# EAGLE board untitled (EAGLE 9.3.0)
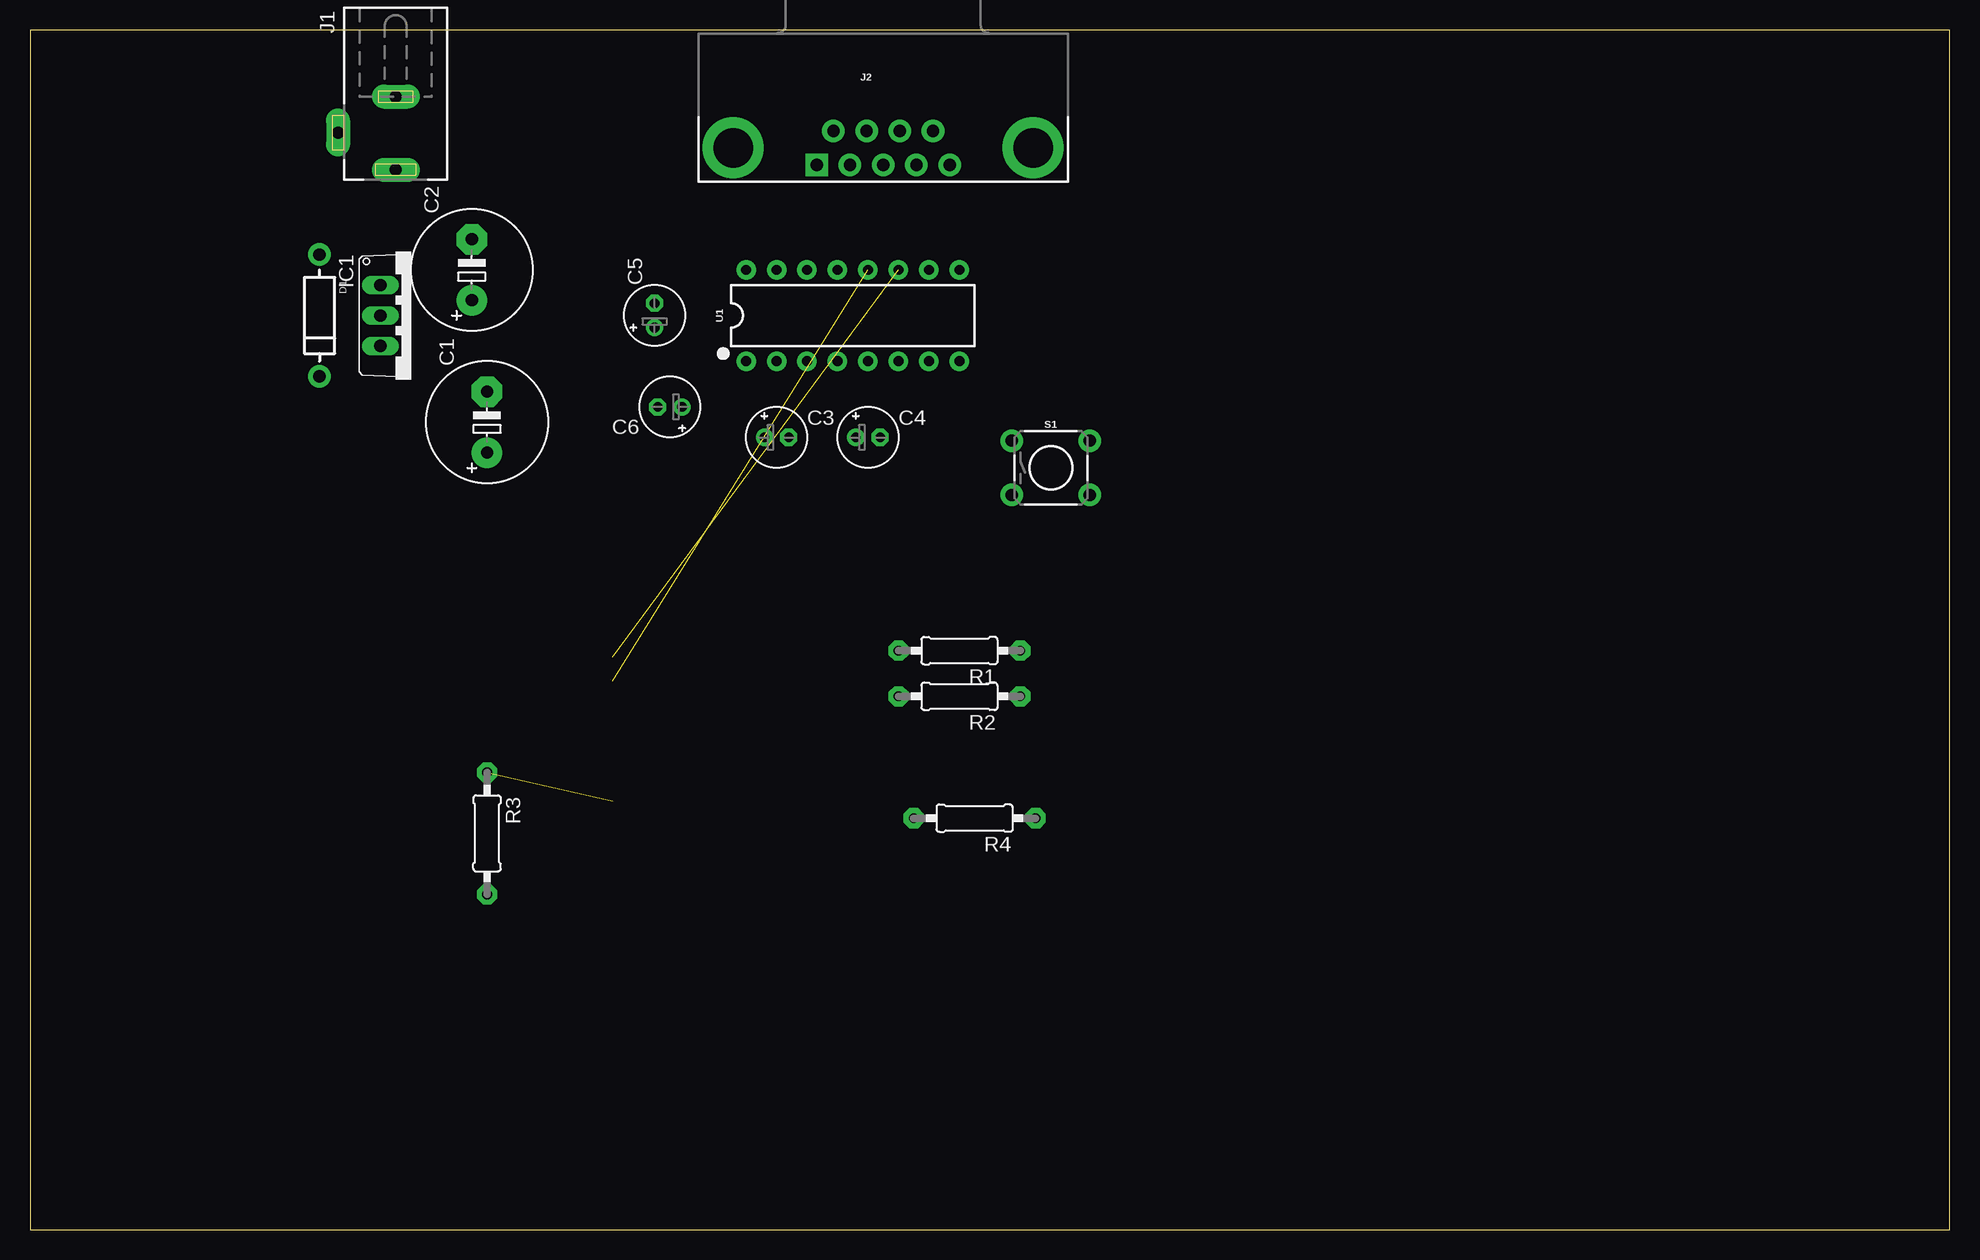
[diagram p0: board, top side]
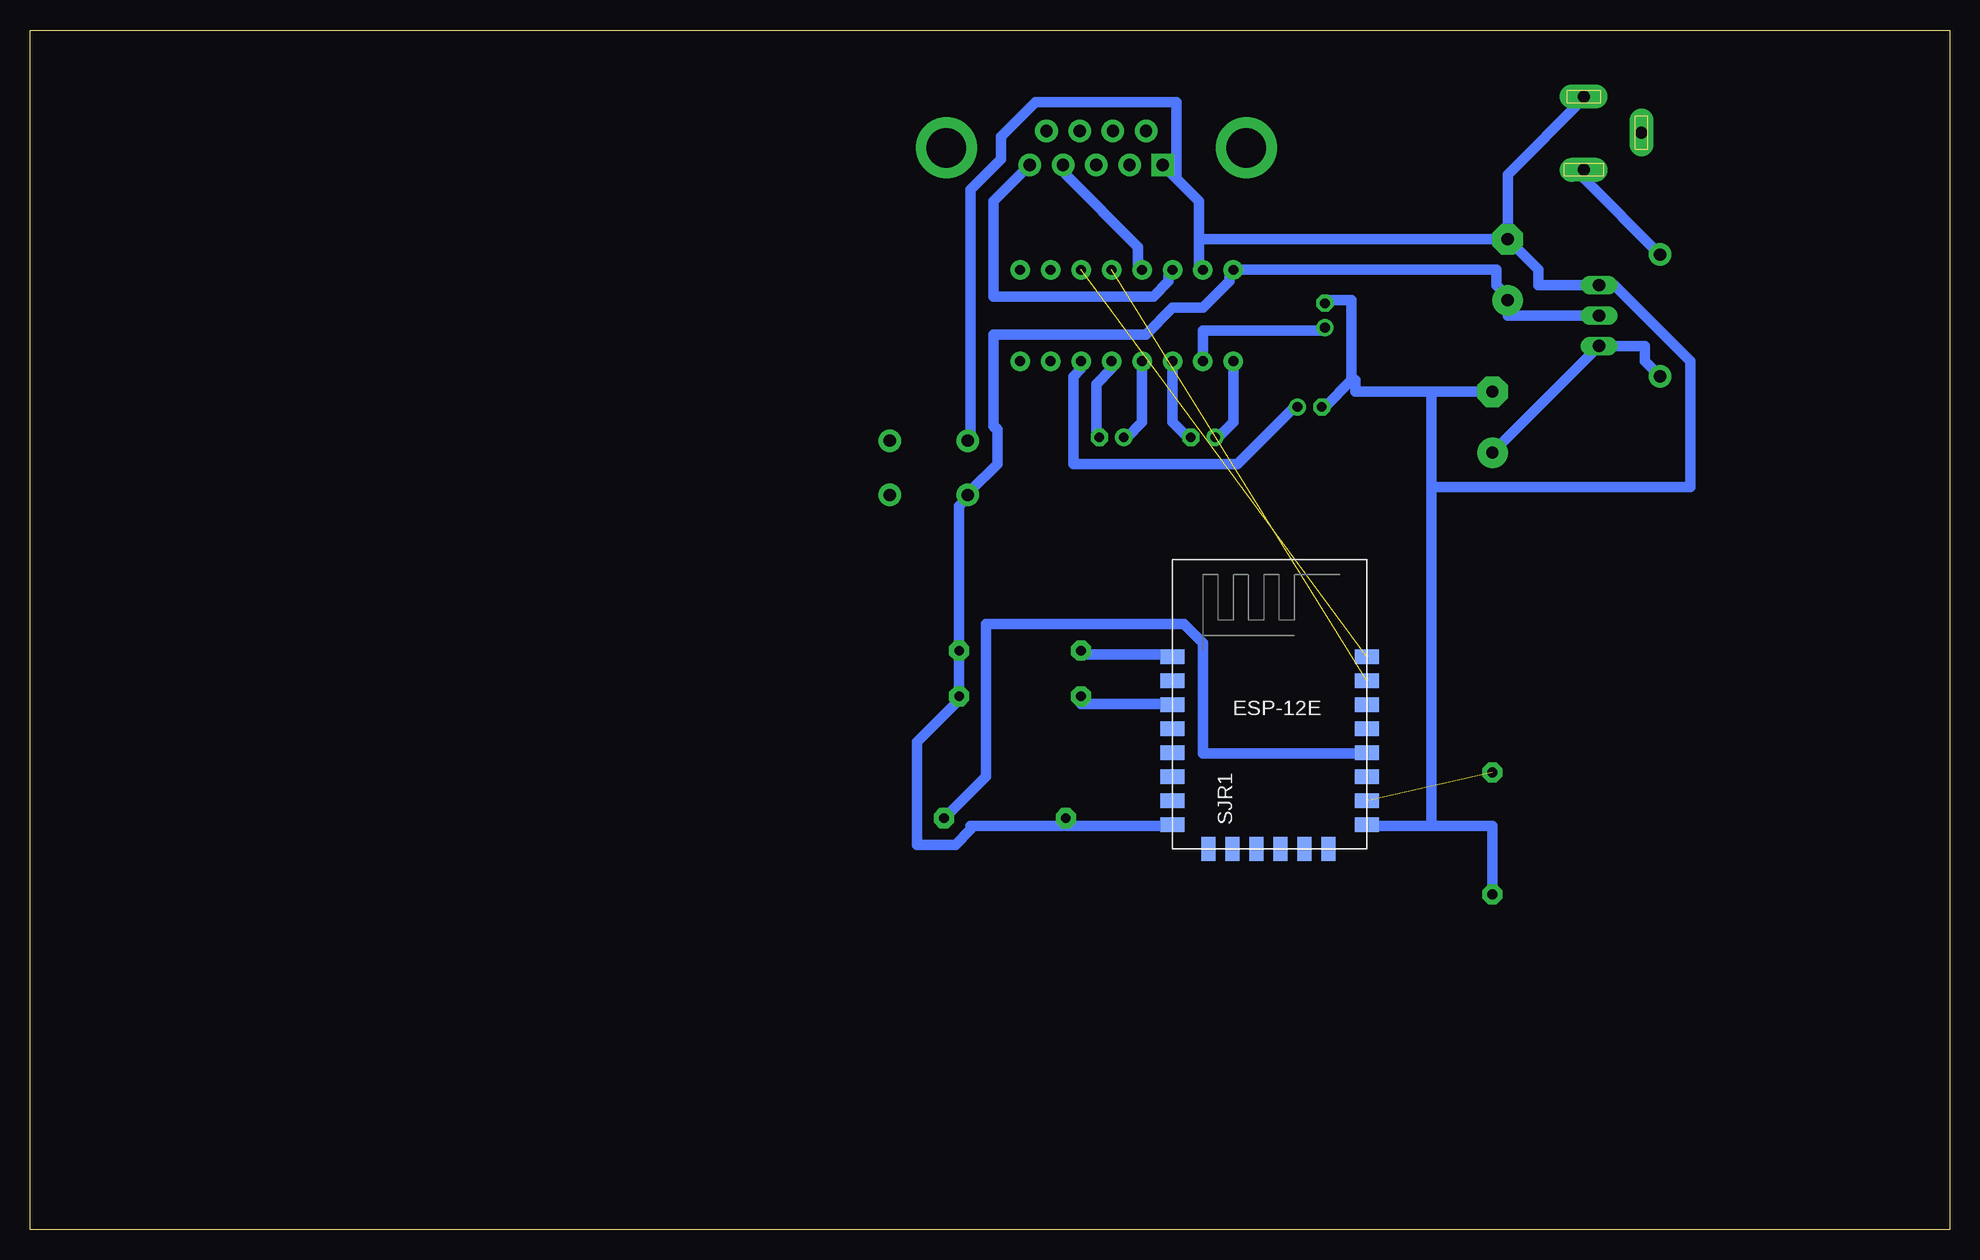
[diagram p1: board, bottom side, seen from below]

Size 160 x 100 mm. Coordinates in mm from the lower left corner, seen from the top.
Outline: 0,0 160,0 160,100 0,100 0,0
Copper layers (1*16): Top 0.035mm / dielectric 1.5mm / Bottom 0.035mm
Design rules "default *": minimum track width 35mil, minimum drill 0.35mm, track to track 35mil, track to pad 35mil, pad to pad 6mil, via to via 6mil, smd to smd 6mil, copper to edge 40mil, drill to drill 6mil, minimum pad ring 10mil, minimum via ring 8mil, stop-mask expansion 4mil, vias tented up to drill 0mil, thermal gap 10mil

## Footprints (pad centres in the part's own frame; a part is rotated, then mirrored left to right if it is on the bottom)
E5-10,5 = drill 1.016 pad 2.54: + -2.54,0 | drill 1.016 pad 2.54 octagon: - 2.54,0
E2-5 = drill 0.813 pad 1.422: + -1.016,0 | drill 0.813 pad 1.422 octagon: - 1.016,0
DIODE-1N4001-KIT = drill 1.016 pad 1.88: A -5.08,0; C 5.08,0
TO220V = drill 1.016 long: 1 -2.54,-2.54; 2 0,-2.54; 3 2.54,-2.54
DCJ0303 = drill 1 pad 2 long: 1 0,3.1; 2 4.8,0; 3 0,-3
DB9_MALE = drill 1.016 pad 1.88: 1 5.54,-1.42; 2 2.77,-1.42; 3 0,-1.42; 4 -2.77,-1.42; 6 4.15,1.42; 7 1.38,1.42; 8 -1.38,1.42; 9 -4.15,1.42 | drill 1.016 pad 1.88 square: 5 -5.54,-1.42 | drill 3.302 pad 5.08: G1 -12.5,0; G2 12.5,0
0207/10 = drill 0.813 pad 1.676 octagon: 1 -5.08,0; 2 5.08,0
TACTILE_SWITCH_PTH_6.0MM = drill 1.016 pad 1.88: 1 -3.251,2.261; 2 3.251,2.261; 3 -3.251,-2.261; 4 3.251,-2.261
ESP8266-ESP12E = smd 2 x 1.2: 1 -7.62,5.84; 2 -7.62,3.84; 3 -7.62,1.84; 4 -7.62,-0.16; 5 -7.62,-2.16; 6 -7.62,-4.16; 7 -7.62,-6.16; 8 -7.62,-8.16; 9 8.58,-8.16; 10 8.58,-6.16; 11 8.58,-4.16; 12 8.58,-2.16; 13 8.58,-0.16; 14 8.58,1.84; 15 8.58,3.84; 16 8.58,5.84 | smd 1.2 x 2: 17 -4.62,-10.16; 18 -2.62,-10.16; 19 -0.62,-10.16; 20 1.38,-10.16; 21 3.38,-10.16; 22 5.38,-10.16
DIP16 = drill 0.813 pad 1.626: 1 -8.89,-3.81; 2 -6.35,-3.81; 3 -3.81,-3.81; 4 -1.27,-3.81; 5 1.27,-3.81; 6 3.81,-3.81; 7 6.35,-3.81; 8 8.89,-3.81; 9 8.89,3.81; 10 6.35,3.81; 11 3.81,3.81; 12 1.27,3.81; 13 -1.27,3.81; 14 -3.81,3.81; 15 -6.35,3.81; 16 -8.89,3.81

## Placement (x,y rotation side)
C1  [E5-10,5]  38.1,67.31 90 top
C2  [E5-10,5]  36.83,80.01 90 top
C3  [E2-5]  62.23,66.04 0 top
C4  [E2-5]  69.85,66.04 0 top
C5  [E2-5]  52.07,76.2 90 top
C6  [E2-5]  53.34,68.58 180 top
D1  [DIODE-1N4001-KIT]  24.13,76.2 270 top
IC1  LM1117T(V)-ADJ  [TO220V]  31.75,76.2 270 top
J1  [DCJ0303]  30.48,91.44 180 top
J2  [DB9_MALE]  71.12,90.17 0 top
R1  [0207/10]  77.47,48.26 180 top
R2  [0207/10]  77.47,44.45 180 top
R3  [0207/10]  38.1,33.02 270 top
R4  [0207/10]  78.74,34.29 180 top
S1  MOMENTARY-SWITCH-SPST-PTH-6.0MM  [TACTILE_SWITCH_PTH_6.0MM]  85.09,63.5 0 top
SJR1  [ESP8266-ESP12E]  57.15,41.91 0 bottom
U1  MAX3232  [DIP16]  68.58,76.2 0 top

## Library data of the parts
C1-C6 D1 = BeagleBone_Blue_R3
IC1 = lm1117_10; MF: Texas Instruments; MPN: LM1777T-ADJ; OC_FARNELL: 9485805; OC_NEWARK: 13B5345
J1 = con-jack; OC_FARNELL: unknown; OC_NEWARK: unknown
J2 = SparkFun-Connectors; PROD_ID: CONN-09904
R1-R4 = adafruit
S1 = SparkFun-Switches; PROD_ID: SWCH-08441; SF_SKU: COM-00097
SJR1 = esp12e
U1 = SparkFun-IC-Comms; PROD_ID: IC-08446

## Nets
GND: C1.- C2.- C5.- C6.- IC1.1 J1.3 J2.5 R3.2 S1.1 SJR1.9 U1.15
N$1: R2.2 SJR1.3
N$2: D1.A J1.1
N$3: C1.+ D1.C IC1.3
N$4: C2.+ IC1.2 R1.1 R2.1 R4.2 S1.3 SJR1.8 U1.16
N$5: R1.2 SJR1.1
N$6: R3.1 SJR1.10
N$7: C3.+ U1.1
N$8: R4.1 SJR1.12
N$9: C3.- U1.3
N$10: C4.+ U1.4
N$11: C4.- U1.5
N$12: C5.+ U1.2
N$13: C6.+ U1.6
N$14: SJR1.16 U1.11
N$15: SJR1.15 U1.12
N$16: J2.2 U1.13
N$17: J2.1 U1.14

## Tracks (layer width: path | path; a pad name or v marks a point on that pad's centre or on a via)
GND
  Bottom 0.889: 43.18,33.66 38.1,33.66 R3.2 | 43.18,33.66 48.26,33.66 SJR1.9 | 49.85,70.8 49.85,77.47 52.07,77.47 C5.- | 49.85,70.8 52.07,68.58 C6.- | 43.18,69.85 49.53,69.85 49.53,70.8 49.85,70.8 | 43.18,69.85 C1.- | 43.18,69.85 43.18,61.91 | 43.18,61.91 43.18,33.66 | C2.- 34.29,80.01 34.29,78.74 IC1.1 27.94,78.74 21.59,72.39 21.59,61.91 43.18,61.91 | C2.- 36.83,87.95 30.48,94.3 J1.3 | U1.15 62.55,80.33 62.55,82.55 | 62.55,82.55 62.55,85.72 64.61,87.79 | 64.61,87.79 65.41,88.58 J2.5 | S1.1 81.6,66.04 81.6,86.68 79.06,89.22 79.06,91.12 76.2,93.98 64.45,93.98 64.45,87.95 64.61,87.79 | 62.55,82.55 C2.-
N$1
  Bottom 0.889: R2.2 72.39,43.81 64.77,43.81 SJR1.3
N$2
  Bottom 0.889: D1.A 30.48,87.63 J1.1
N$3
  Bottom 0.889: D1.C 25.4,72.39 25.4,73.66 IC1.3 29.53,73.66 29.53,73.34 C1.+
N$4
  Bottom 0.889: IC1.2 36.83,76.2 C2.+ 36.83,77.79 37.78,78.74 37.78,80.01 U1.16 59.69,79.69 60.01,79.38 60.01,79.06 62.23,76.83 64.77,76.83 66.99,74.61 79.69,74.61 79.69,66.99 79.38,66.67 79.38,63.82 81.6,61.59 S1.3 81.92,60.96 82.55,60.33 R1.1 R2.1 82.55,44.13 86.04,40.64 86.04,32.07 82.87,32.07 81.6,33.34 81.6,33.66 73.98,33.66 R4.2 73.66,33.66 64.77,33.66 SJR1.8
N$5
  Bottom 0.889: R1.2 72.39,47.94 64.77,47.94 SJR1.1
N$6  (1 unrouted)
N$7
  Bottom 0.889: U1.1 59.69,67.31 60.96,66.04 C3.+
N$8
  Bottom 0.889: R4.1 80.33,37.78 80.33,50.48 63.82,50.48 62.23,48.9 62.23,39.69 48.58,39.69 SJR1.12
N$9
  Bottom 0.889: U1.3 64.77,67.31 63.5,66.04 C3.-
N$10
  Bottom 0.889: U1.4 67.31,67.31 68.58,66.04 C4.+
N$11
  Bottom 0.889: U1.5 69.85,71.75 71.12,70.48 71.12,66.04 C4.-
N$12
  Bottom 0.889: U1.2 62.23,74.93 52.07,74.93 C5.+
N$13
  Bottom 0.889: U1.6 72.39,71.75 73.03,71.12 73.03,63.82 59.37,63.82 54.61,68.58 C6.+
N$14  (1 unrouted)
N$15  (1 unrouted)
N$16
  Bottom 0.889: U1.13 67.63,80.33 67.63,81.92 73.66,87.95 73.66,88.58 J2.2
N$17
  Bottom 0.889: U1.14 65.09,79.69 65.09,79.06 66.36,77.79 79.69,77.79 79.69,85.72 76.83,88.58 J2.1